# Altium PCB Diode Board.PcbDoc
Units mm, origin at the board's own origin, x right, y up, seen from the top; angles counter-clockwise.
Board outline 35.03 x 26.05 mm, 2 copper layers (Top Layer, Bottom Layer); 2 components, 2 nets, 5 pads, 70 vias.
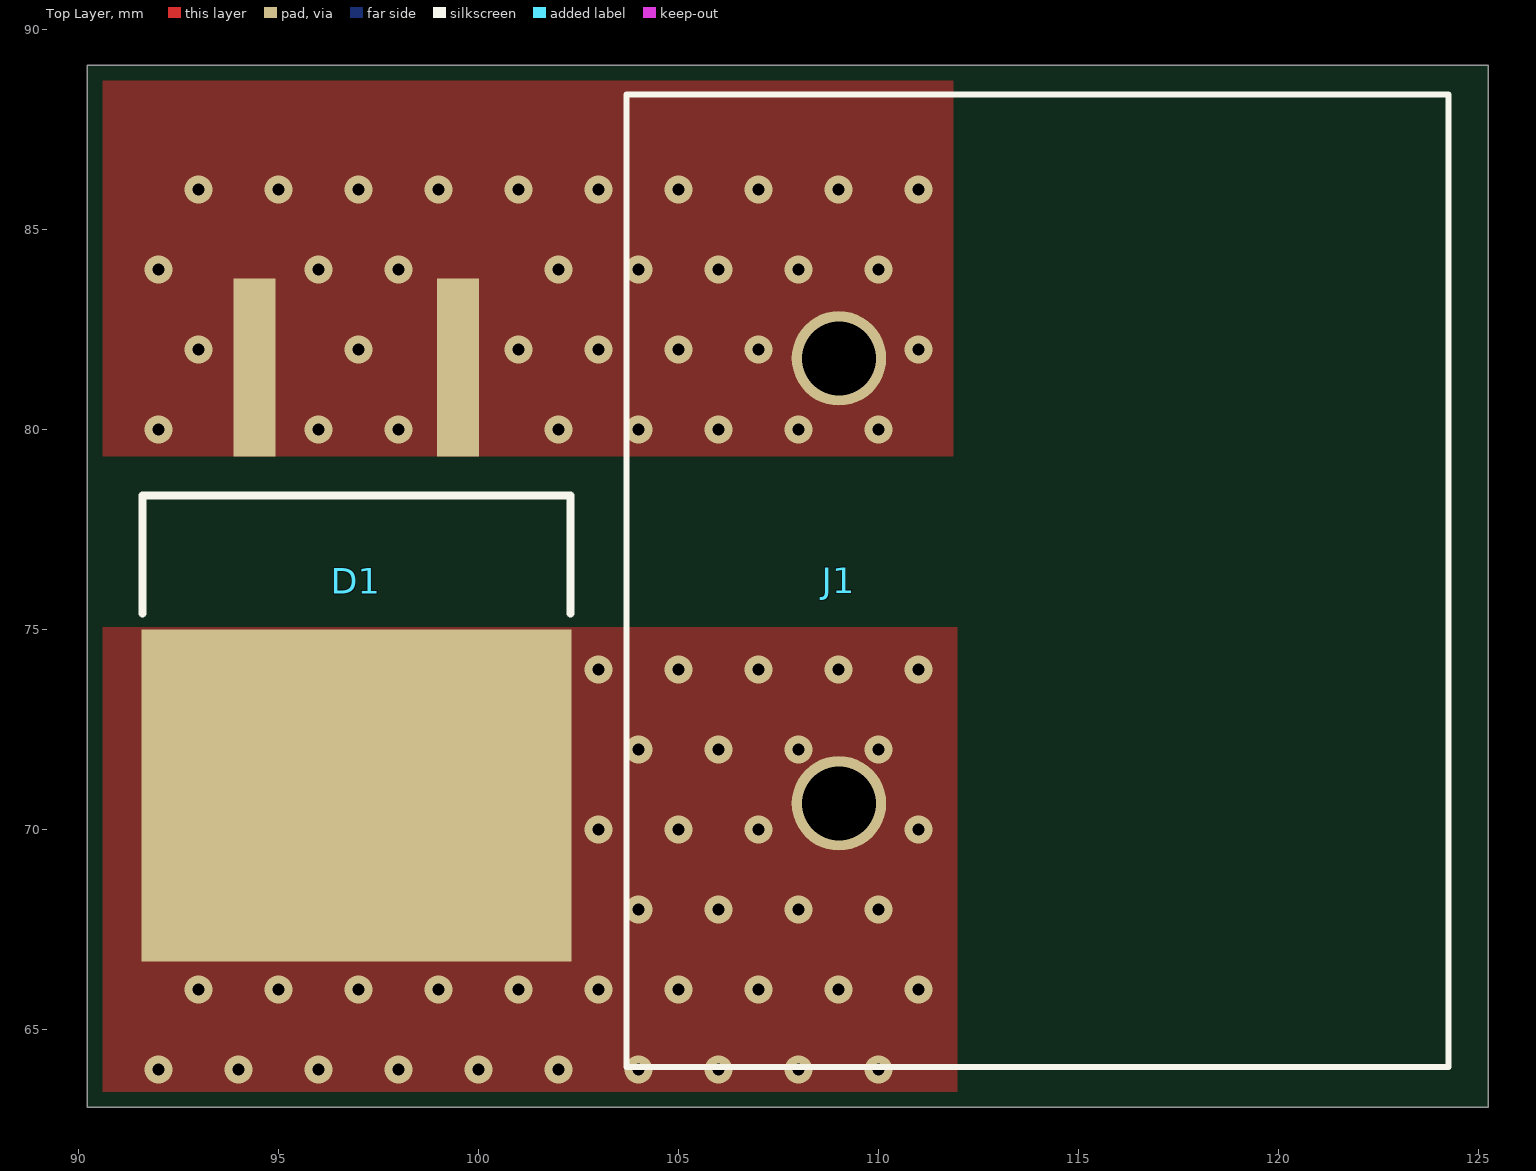
[diagram p0: Top Layer view]
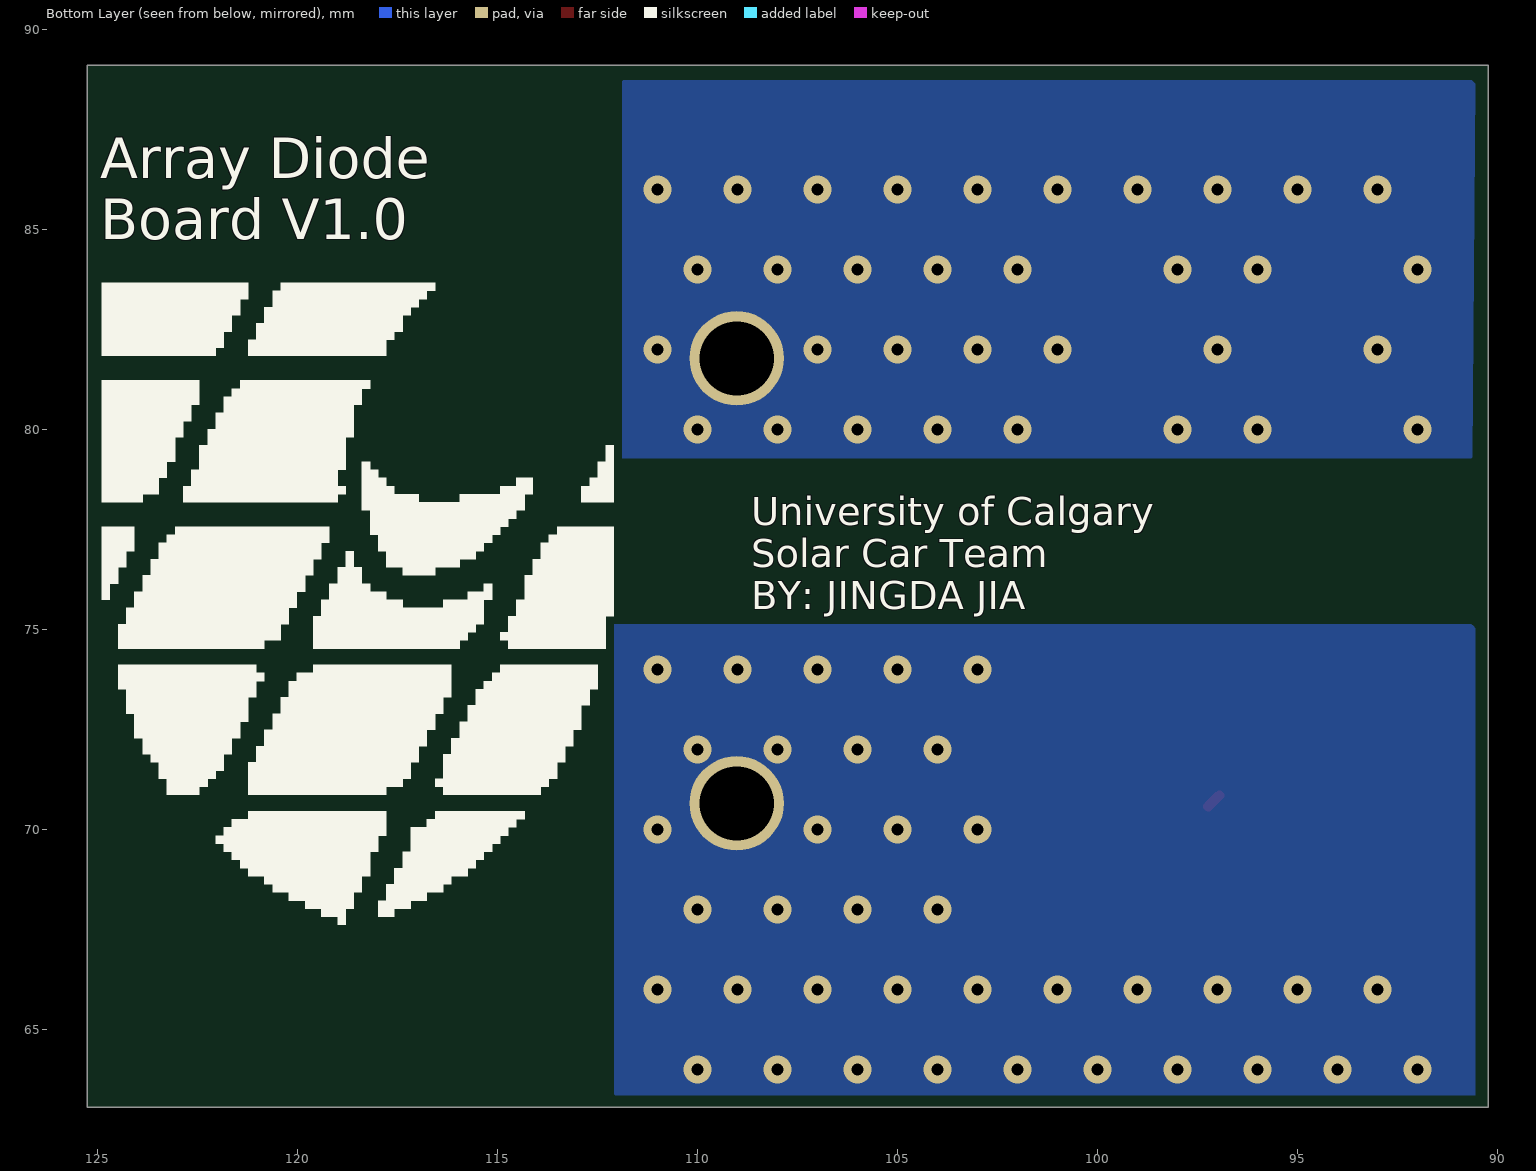
[diagram p1: Bottom Layer view, seen from below]

## Layer stack, top to bottom
Top Solder: solder mask 0.0102, Solder Resist, Dk 3.5
Top Layer: signal copper 0.0356
Dielectric 1: dielectric 0.32, FR-4, Dk 4.8
Bottom Layer: signal copper 0.0356
Bottom Solder: solder mask 0.0102, Solder Resist, Dk 3.5

## Board outline
90.225,63.05 125.25,63.05 125.25,89.1 90.225,89.1

## Design rules (kind name [scope] priority, off if disabled: settings)
BoardOutlineClearance [All] p1: gap=0.3 ignorepadtopadclearanceinfootprint=FALSE
Clearance [All] p1: gap=0.152 ignorepadtopadclearanceinfootprint=FALSE except(0: Arc-Hole Track-Hole SMDPad-Hole THPad-Hole Via-Hole Fill-Hole Poly-Hole Region-Hole Text-Hole)
ComponentClearance [All] p1: gap=0.1 collisioncheckmode=3 verticalgap=0.254 showdistances=FALSE
FabricationTestPointUsage TestPointUsage [All] p1: valid=0 allowmultiple=FALSE
FabricationTestpoint Testpoint [All] p1: side=3 testpointundercomponent=TRUE minsize=1.016 maxsize=2.54 preferedsize=1.524 minholesize=0 maxholesize=1.016 preferedholesize=0.813 testpointgrid=0.025 allowsidetop=TRUE allowsidebottom=TRUE usegrid=TRUE gridtolerance=0
HoleSize [All] p1: absolutevalues=TRUE maxlimit=6.3 minlimit=0.3 maxpercent=80.000 minpercent=20.000
HoleToHoleClearance [All] p1: gap=0.45 allowstackedmicrovias=TRUE
MinimumAnnularRing [All] p1: minimumring=0.15
MinimumSolderMaskSliver [All] p1: minsoldermaskwidth=0.075
PlaneClearance [All] p1: clearance=0.5
PlaneConnect [All] p1: planeconnectstyle=Direct reliefexpansion=0.508 reliefentries=4 reliefconductorwidth=0.254 reliefairgap=0.254
PolygonConnect "GND Via" [isVia AND InNet('GND')] p1: connectstyle=Direct reliefconductorwidth=0.254 reliefentries=4 polygonreliefangle="90 Angle" airgapwidth=0.254 // GND Via Connection
PolygonConnect [All] p2: connectstyle=Direct reliefconductorwidth=0.254 reliefentries=4 polygonreliefangle="90 Angle" airgapwidth=0.25
RoutingVias [All] p1: holewidth=0.3 width=0.6 viastyle="Through Hole" minholewidth=0.3 minwidth=0.6 maxholewidth=6.3 maxwidth=6.6
SilkToSilkClearance [All] p1: silktosilkclearance=0.15
SilkToSolderMaskClearance SilkscreenOverComponentPads [IsPad] p1: minsilkscreentomaskgap=0.25 clearancetoexposedcopper=TRUE
SolderMaskExpansion [All] p1: expansion=0.1
Width [All] p1: maxlimit=2 minlimit=0.152 preferedwidth=0.25 minimp=50.000000 maximp=50.000000 favimp=50.000000
20 further rules are at their usual default settings.

## Components (designator, comment, footprint, x,y, rotation, side; value= is the part's Value field where it differs from the comment)
D1 "SM74611" "SM74611 Smart Bypass Diode - TI" 96.95,75.25 r270 top
J1 "8PCV-02-006" CON2_1X2_P438R_B 114.35,81.775 r270 top value=Value

## Footprints (in the part's own frame and the unit in brackets; to place one, negate y for a bottom-side part, rotate by r counter-clockwise, add the part's x,y. Pads: shape width x height; smd on the part's side, far side on the other; paste and mask are expansions set on the pad)
CON2_1X2_P438R_B [mil]
  round 93 / inner round 60 / far side round 93 hole 73 paste+0 mask+0: 1(0,-210) 2(438,-210)
  silkscreen extent -260,-419 698,390, body extent -255,-415 693,385, height 770
"SM74611 Smart Bypass Diode - TI" [mm] "Digikey: 296-35688-1-ND / MFG: SM74611KTTR"
  rect 4.45x1.05 smd: 1(-6.3,2.54) 3(-6.3,-2.54)
  rect 8.3x10.75 smd: 4(4.4,0)
  silkscreen extent -3.1,-5.35 -0.15,5.35, body extent -7.07,-5.33 8.17,5.33, height 5.08

## Part data
D1: library part "SM74611 Smart Bypass Diode - TI", "SM74611 Smart Bypass Diode - TI"
J1: "Imported", Built_By=EMA_UL_Team, C="Copyright (C) 2015 Accelerated Designs. All rights reserved", Manufacturer_Part_Number=8PCV-02-006, RefDes=RefDes, Type=Type, Vendor="TE Connectivity"

## Via types
v1: diameter 0.7, hole 0.3, Top Layer to Bottom Layer, 70 vias

## Nets (pads, with @x,y where several pads share a name; then routed paths per layer and width w, separated by ;. In a path a pad name is that pad's centre, name@x,y a point inside that pad or via, vN(x,y) a via of type N, cw(c..) or ccw(c..) an arc to the next point about the centre after c; other vN are vias at no path point)
Anode: D1.1 D1.3 J1.1
  other v1: 92,80 96,80 98,80 102,80 104,80 106,80 108,80 110,80 93,82 97,82 101,82 103,82 105,82 107,82 111,82 92,84 96,84 98,84 102,84 104,84 106,84 108,84 110,84 93,86 95,86 97,86 99,86 101,86 103,86 105,86 107,86 109,86 111,86
Cathode: D1.4 J1.2 | length 0.4
  Top Layer w0.254: D1.4 D1.4@97.225,70.575
  other v1: 92,64 94,64 96,64 98,64 100,64 102,64 104,64 106,64 108,64 110,64 93,66 95,66 97,66 99,66 101,66 103,66 105,66 107,66 109,66 111,66 104,68 106,68 108,68 110,68 103,70 105,70 107,70 111,70 104,72 106,72 108,72 110,72 103,74 105,74 107,74 109,74 111,74

## Polygon pours and split planes (outlines as drawn)
Cathode on Top Layer "Cathode -Top layer" (solid, pour order 6): 89.699,75.05 111.975,75.05 111.975,62.421 89.647,62.449
Anode on Top Layer "Anode -Top layer" (solid, pour order 4): 89.65,90.225 111.875,90.21 111.875,79.325 89.65,79.325
Cathode on Bottom Layer "Cathode -Bottom Layer" (solid, pour order 10): 90.6,75.125 112.075,75.125 112.075,63.375 112.025,63.325 90.55,63.325 90.55,75.025 90.475,75.1
Anode on Bottom Layer "Anode -Bottom Layer" (solid, pour order 8): 90.55,88.725 111.85,88.725 111.875,88.7 111.875,79.275 90.65,79.275 90.625,79.3

## Silkscreen, mask and mechanical layers (free items; w line width, h text height)
Bottom Overlay:
  drawing of 15 lines, arcs and shapes, not listed
  text "Array Diode / Board V1.0" at 124.925,84.75 h1.02
  text "University of Calgary  / Solar Car Team / BY: JINGDA JIA" at 108.65,75.5 h0.7
Mechanical 1:
  the board outline again, w0.1